# Altium PCB PCB3.PcbDoc
Units mm, origin at the board's own origin, x right, y up, seen from the top; angles counter-clockwise.
Board outline 159.89 x 71.5 mm, 2 copper layers (Top Layer, Bottom Layer); 21 components, 42 nets, 178 pads, 49 vias.
Unrouted connection lines stored in the file: 2.
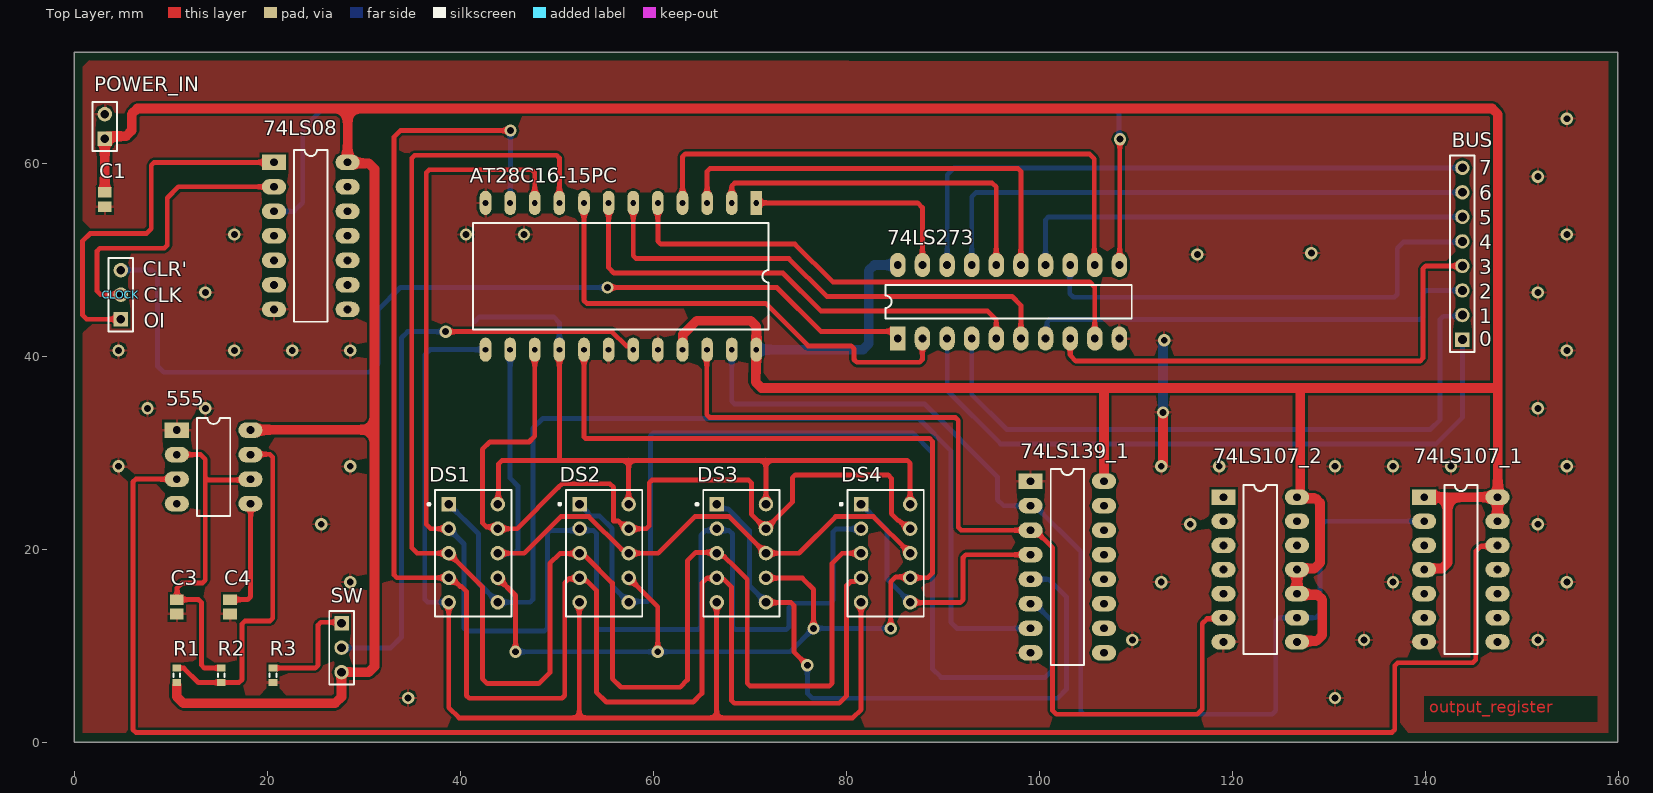
[diagram p0: Top Layer view]
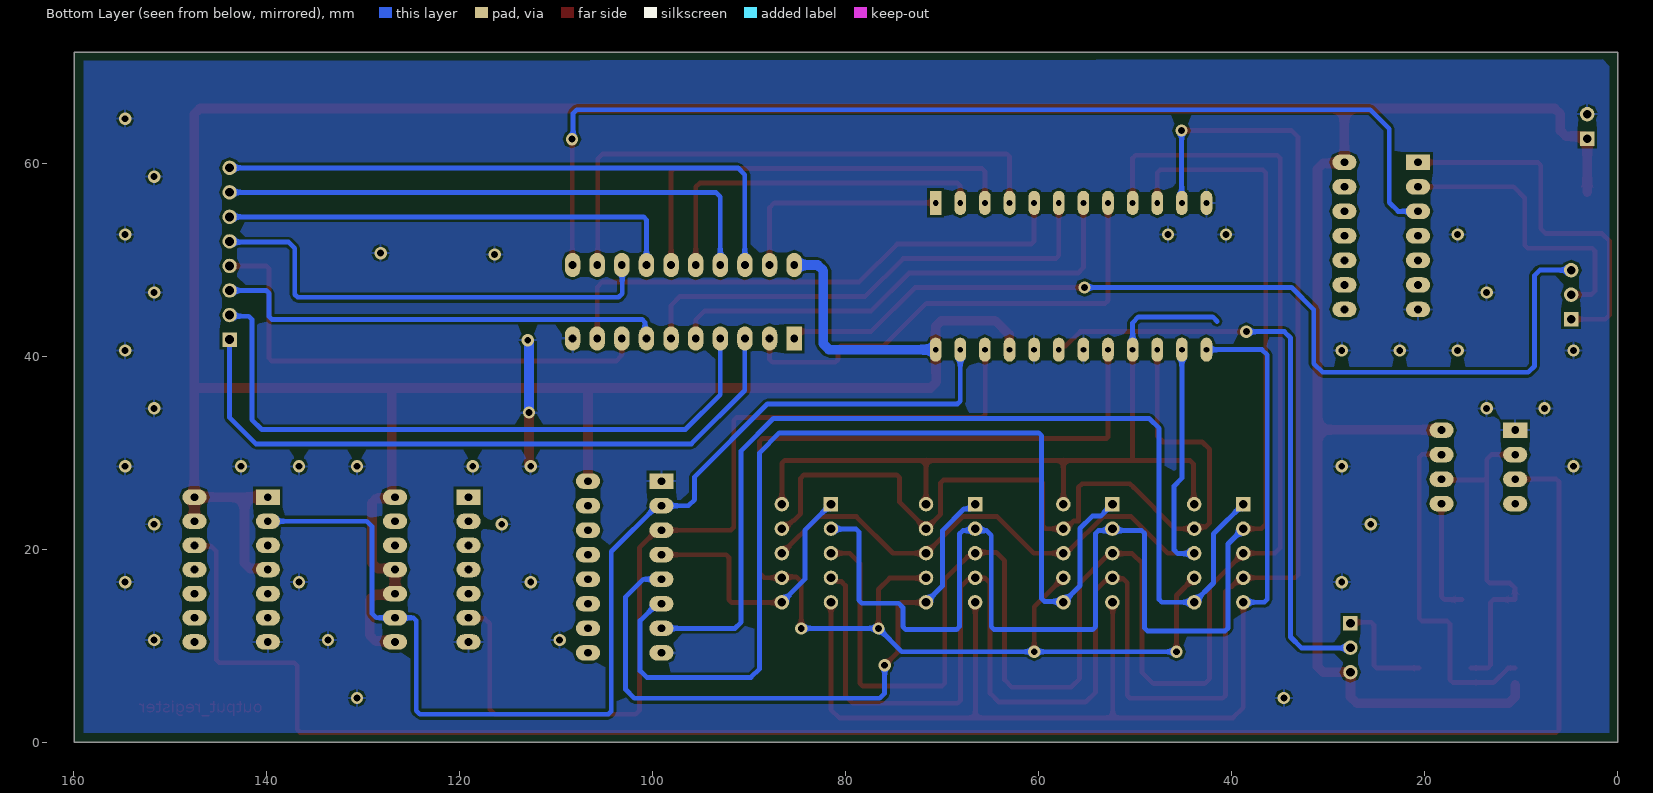
[diagram p1: Bottom Layer view, seen from below]

## Layer stack, top to bottom
Top Solder: solder mask 0.0102, Solder Resist, Dk 3.5
Top Layer: signal copper 0.0356
Dielectric 1: dielectric 0.32, FR-4, Dk 4.8
Bottom Layer: signal copper 0.0356
Bottom Solder: solder mask 0.0102, Solder Resist, Dk 3.5

## Board outline
0,0 159.893,0 159.893,71.501 0,71.501

## Design rules (kind name [scope] priority, off if disabled: settings)
Clearance [All] p1: gap=0.254 ignorepadtopadclearanceinfootprint=FALSE except(0: Arc-Hole Track-Hole SMDPad-Hole THPad-Hole Via-Hole Fill-Hole Poly-Hole Region-Hole Text-Hole; 0.245: Arc-SMDPad Track-SMDPad; 1: Arc-Arc Arc-Track Track-Track)
PolygonConnect [All] p1: connectstyle=Relief reliefconductorwidth=0.254 reliefentries=4 polygonreliefangle="90 Angle" airgapwidth=0.254
RoutingVias [All] p1: holewidth=0.711 width=1.27 viastyle="Through Hole" minholewidth=0.711 minwidth=1.27 maxholewidth=0.711 maxwidth=1.27
SolderMaskExpansion [All] p1: expansion=0.102 istentingtop=FALSE
Width VCC [InNet('VCC')] p1: maxlimit=2 minlimit=1 preferedwidth=1
Width GND [InNet('GND')] p2: maxlimit=2 minlimit=1 preferedwidth=1
Width [All] p3: maxlimit=1 minlimit=0.5 preferedwidth=0.5
30 further rules are at their usual default settings.

## Components (designator, comment, footprint, x,y, rotation, side; value= is the part's Value field where it differs from the comment)
74LS08 "DM74LS08N" SN74LS08N 20.708,60.084 r0 top
74LS107_1 "SN74LS107AN" DM74LS107 139.824,25.408 r0 top
74LS107_2 "SN74LS107AN" DM74LS107 119.048,25.408 r0 top
74LS139_1 "SN74LS139AN" SN74LS139AN 99.065,27.066 r0 top
74LS273 "SN74LS273N" SN74LS273N 85.313,41.833 r90 top
555 "NE555P" LM555 10.642,32.35 r0 top
AT28C16-15PC "AT28C16-15PC" AT28C16-15PC 70.662,55.88 r270 top
BUS "Header 8" HDR1X8 143.788,41.729 r90 top
C1 "Cap Pol3" C0805 3.182,56.215 r270 top value=0.1uF
C3 "Cap Pol3" C0805 10.642,14.048 r270 top value=0.01uF
C4 "Cap Pol3" C0805 16.15,14.048 r270 top value=0.01uF
CLOCK "Header 3" HDR1X3 4.845,43.838 r90 top
DS1 "Dpy Red-CA" A 41.344,19.595 r0 top
DS2 "Dpy Red-CA" A 54.894,19.595 r0 top
DS3 "Dpy Red-CA" A 69.116,19.595 r0 top
DS4 "Dpy Red-CA" A 84.045,19.595 r0 top
POWER_IN "Header 2" HDR1X2 3.182,62.533 r90 top
R1 "Res3" J1-0603 10.642,6.956 r270 top value=1K
R2 "Res3" J1-0603 15.24,6.956 r90 top value=100K
R3 "Res3" J1-0603 20.612,6.956 r270 top value=1K
SW "Header 3" HDR1X3 27.702,12.356 r270 top

## Footprints (in the part's own frame and the unit in brackets; to place one, negate y for a bottom-side part, rotate by r counter-clockwise, add the part's x,y. Pads: shape width x height; smd on the part's side, far side on the other; paste and mask are expansions set on the pad)
A [mm] "LED, 7-Segment Display, 7.62 mm, RHD; 10 Leads; Row Space 5.08 mm; Pitch 2.54 mm"
  rect 1.5x1.5 hole 0.9: 1(-2.54,5.08)
  round 1.5 hole 0.9: 2(-2.54,2.54) 3(-2.54,0) 4(-2.54,-2.54) 5(-2.54,-5.08) 6(2.54,-5.08) 7(2.54,-2.54) 8(2.54,0) 9(2.54,2.54) 10(2.54,5.08)
  silkscreen extent -4.72,-6.55 3.95,6.55, body extent -3.95,-6.55 3.95,6.55, height 6.34
AT28C16-15PC [mm]
  rect 2.5x1.2 hole 0.6: 1(0,0)
  oval 2.5x1.2 hole 0.6: 2(0,-2.55) 3(0,-5.1) 4(0,-7.65) 5(0,-10.2) 6(0,-12.75) 7(0,-15.3) 8(0,-17.85) 9(0,-20.4) 10(0,-22.95) 11(0,-25.5) 12(0,-28.05) 13(15.2,-28.05) 14(15.2,-25.5) 15(15.2,-22.95) 16(15.2,-20.4) 17(15.2,-17.85) 18(15.2,-15.3) 19(15.2,-12.75) 20(15.2,-10.2) 21(15.2,-7.65) 22(15.2,-5.1) 23(15.2,-2.55) 24(15.2,0)
  silkscreen extent 2.08,-29.32 13.12,1.27, body extent 0.13,-29.91 15.37,2.73, height 6.29
C0805 [mm] "Chip Capacitor, Body 2.0x1.3mm, IPC High Density"
  rect 1.1x1.4 smd: 1(-0.75,0) 2(0.75,0)
  body extent -1.1,-0.72 1.1,0.72, height 1.4
DM74LS107 [mm]
  rect 2.5x1.6 / inner rect 2.5x1.2 / far side rect 2.5x1.6 hole 0.8: 1(0,0)
  oval 2.5x1.6 / inner oval 2.5x1.2 / far side oval 2.5x1.6 hole 0.8: 2(0,-2.5) 3(0,-5) 4(0,-7.5) 5(0,-10) 6(0,-12.5) 7(0,-15) 8(7.6,-15) 9(7.6,-12.5) 10(7.6,-10) 11(7.6,-7.5) 12(7.6,-5) 13(7.6,-2.5) 14(7.6,0)
  silkscreen extent 2.08,-16.25 5.52,1.25, body extent -0.12,-17.49 7.75,2.51, height 5.6
HDR1X2 [mm] "Connector; Header; 2 Position"
  rect 1.5x1.5 hole 0.9: 1(0,0)
  round 1.5 hole 0.9: 2(2.54,0)
  silkscreen extent -1.27,-1.27 3.81,1.27
HDR1X3 [mm] "Connector; Header; 3 Position"
  rect 1.5x1.5 hole 0.9: 1(0,0)
  round 1.5 hole 0.9: 2(2.54,0) 3(5.08,0)
  silkscreen extent -1.27,-1.27 6.35,1.27
HDR1X8 [mm] "Connector; Header; 8 Position"
  rect 1.5x1.5 hole 0.9: 1(0,0)
  round 1.5 hole 0.9: 2(2.54,0) 3(5.08,0) 4(7.62,0) 5(10.16,0) 6(12.7,0) 7(15.24,0) 8(17.78,0)
  silkscreen extent -1.27,-1.27 19.05,1.27
J1-0603 [mm] "Chip Resistor, Body 1.6x0.8mm, IPC High Density"
  rect 0.7x0.9 smd: 1(-0.75,0) 2(0.75,0)
  silkscreen extent -0.2,-0.35 0.2,0.35, body extent -0.85,-0.48 0.85,0.48, height 0.9
LM555 [mm]
  rect 2.5x1.6 hole 0.8: 1(0,0)
  oval 2.5x1.6 hole 0.8: 2(0,-2.54) 3(0,-5.08) 4(0,-7.62) 5(7.62,-7.62) 6(7.62,-5.08) 7(7.62,-2.54) 8(7.62,0)
  silkscreen extent 2.08,-8.89 5.54,1.27, body extent -0.25,-9.65 14.6,1.78, height 4.69
SN74LS08N [mm]
  rect 2.5x1.6 hole 0.8: 1(0,0)
  oval 2.5x1.6 hole 0.8: 2(0,-2.54) 3(0,-5.08) 4(0,-7.62) 5(0,-10.16) 6(0,-12.7) 7(0,-15.24) 8(7.62,-15.24) 9(7.62,-12.7) 10(7.62,-10.16) 11(7.62,-7.62) 12(7.62,-5.08) 13(7.62,-2.54) 14(7.62,0)
  silkscreen extent 2.08,-16.51 5.54,1.27, body extent -0.19,-17.02 11.18,2.03, height 4.51
SN74LS139AN [mm]
  rect 2.5x1.6 / inner rect 2.5x1.2 / far side rect 2.5x1.6 hole 0.8: 1(0,0)
  oval 2.5x1.6 / inner oval 2.5x1.2 / far side oval 2.5x1.6 hole 0.8: 2(0,-2.54) 3(0,-5.08) 4(0,-7.62) 5(0,-10.16) 6(0,-12.7) 7(0,-15.24) 8(0,-17.78) 9(7.6,-17.78) 10(7.6,-15.24) 11(7.6,-12.7) 12(7.6,-10.16) 13(7.6,-7.62) 14(7.6,-5.08) 15(7.6,-2.54) 16(7.6,0)
  silkscreen extent 2.08,-19.05 5.52,1.27, body extent -0.25,-19.05 7.62,0.95, height 5.6
SN74LS273N [mm]
  rect 2.5x1.6 hole 0.8: 1(0,0)
  oval 2.5x1.6 hole 0.8: 2(0,-2.55) 3(0,-5.1) 4(0,-7.65) 5(0,-10.2) 6(0,-12.75) 7(0,-15.3) 8(0,-17.85) 9(0,-20.4) 10(0,-22.95) 11(7.62,-22.95) 12(7.62,-20.4) 13(7.62,-17.85) 14(7.62,-15.3) 15(7.62,-12.75) 16(7.62,-10.2) 17(7.62,-7.65) 18(7.62,-5.1) 19(7.62,-2.55) 20(7.62,0)
  silkscreen extent 2.08,-24.22 5.54,1.27, body extent 0,-23.73 7.87,0.87, height 4.86

## Part data
74LS08: "IC GATE AND 4CH 2-INP 14-DIP", Case/Package=DIP, High Level Output Current=-400uA, Low Level Output Current=8mA, Manufacturer="ON Semiconductor / Fairchild", Max Operating Temperature=70°C, Max Supply Voltage=5.25V, Min Operating Temperature=0°C, Min Supply Voltage=4.75V, Package Quantity=25, Supplier Part Number 1=512-DM74LS08N, Category="Logic Gates", ComponentLink1Description=https://datasheet.ciiva.com/4825/74ls08-196234-4825713.pdf?src-supplier=Mouser, ComponentLink1URL=https://datasheet.ciiva.com/4825/74ls08-196234-4825713.pdf?src-supplier=Mouser, ComponentLink2Description=https://datasheet.ciiva.com/1877/dm74ls08-1877307.pdf?src-supplier=Digi-Key, ComponentLink2URL=https://datasheet.ciiva.com/1877/dm74ls08-1877307.pdf?src-supplier=Digi-Key, Lead Free="Contains Lead", Logic Function=AND, Manufacturer Part Number=DM74LS08N, Mount="Through Hole", Number of Circuits=4, Number of Gates=4, Number of Inputs=2, Number of Pins=14, Packaging=Rail/Tube, Propagation Delay=18ns, RoHS=Yes, Supplier 1=Mouser
74LS107_1 74LS107_2: "Flip Flop JK-Type Neg-Edge 2-Element 14-Pin PDIP Tube", Case/Package=PDIP, Frequency=45MHz, High Level Output Current=-400uA, Low Level Output Current=8mA, Manufacturer="Texas Instruments", Max Operating Temperature=70°C, Max Supply Voltage=5.25V, Min Operating Temperature=0°C, Min Supply Voltage=4.75V, Nominal Supply Current=100uA, Operating Supply Voltage=5V, Package Quantity=25, Supplier Part Number 1=95M4428, Clock Edge Trigger Type="Negative Edge,Positive Edge", ComponentLink1Description=https://www.distrelec.biz/Web/Downloads/_t/ds/sn74ls107a_eng_tds.pdf?mime=application%2Fpdf&src-supplier=Distrelec, ComponentLink1URL=https://www.distrelec.biz/Web/Downloads/_t/ds/sn74ls107a_eng_tds.pdf?mime=application%2Fpdf&src-supplier=Distrelec, ComponentLink2Description=http://focus.ti.com/lit/ds/symlink/sn74107.pdf?src-supplier=Avnet+Europe, ComponentLink2URL=http://focus.ti.com/lit/ds/symlink/sn74107.pdf?src-supplier=Avnet+Europe, ComponentLink3Description=http://www.ti.com/general/docs/lit/getliterature.tsp?genericPartNumber=SN74LS107A&&fileType=pdf&src-supplier=Avnet, ComponentLink3URL=http://www.ti.com/general/docs/lit/getliterature.tsp?genericPartNumber=SN74LS107A&&fileType=pdf&src-supplier=Avnet, ComponentLink4Description=https://source.z2data.com/2016/10/12/6/26/54/563/639426/sn74107.pdf?src-supplier=Digi-Key, ComponentLink4URL=https://source.z2data.com/2016/10/12/6/26/54/563/639426/sn74107.pdf?src-supplier=Digi-Key, ComponentLink5Description=http://www.farnell.com/datasheets/1967736.pdf?src-supplier=Element14, ComponentLink5URL=http://www.farnell.com/datasheets/1967736.pdf?src-supplier=Element14, ComponentLink6Description=https://www.verical.com/server-webapp/html/getDatasheet?partID=250176&src-supplier=Verical, ComponentLink6URL=https://www.verical.com/server-webapp/html/getDatasheet?partID=250176&src-supplier=Verical, Height=4.57mm, Lead Free="Lead Free", Length=19.69mm, Logic Function=Flip-Flop,JK-Type, Manufacturer Part Number=SN74LS107AN, Max Frequency=45MHz, Mount="Through Hole", Number of Bits=2, Number of Bits per Element=1, Number of Circuits=2, Number of Elements=2, Number of Input Lines=4, Number of Output Lines=2, Number of Pins=14, Output Current=8mA, Output Type=TTL, Packaging=Rail/Tube, Polarity=Non-Inverting, Propagation Delay=20ns, Radiation Hardening=No, REACH SVHC="No SVHC", Stock 1=0, Supplier 1=Newark, Turn-On Delay Time=15ns, Weight=0.032734oz, Width=6.6mm
74LS139_1: "TEXAS INSTRUMENTS         SN74LS139AN            IC, DECODER/DEMUX, 74LS139", Case/Package=PDIP, High Level Output Current=-400uA, Low Level Output Current=8mA, Manufacturer="Texas Instruments", Max Operating Temperature=70°C, Max Power Dissipation=200mW, Max Supply Voltage=5.25V, Min Operating Temperature=0°C, Min Supply Voltage=4.75V, Nominal Supply Current=100uA, Operating Supply Voltage=5V, Package Quantity=25, Supplier Part Number 1=308253, Bandwidth=35MHz, ComponentLink1Description=http://www.farnell.com/datasheets/2018724.pdf?src-supplier=Element14, ComponentLink1URL=http://www.farnell.com/datasheets/2018724.pdf?src-supplier=Element14, ComponentLink2Description=https://www.distrelec.biz/Web/Downloads/57/06/lm645706.pdf?mime=application%2Fpdf&src-supplier=Distrelec, ComponentLink2URL=https://www.distrelec.biz/Web/Downloads/57/06/lm645706.pdf?mime=application%2Fpdf&src-supplier=Distrelec, ComponentLink3Description=http://www.ti.com/lit/ds/symlink/sn74s139a.pdf?src-supplier=Digi-Key, ComponentLink3URL=http://www.ti.com/lit/ds/symlink/sn74s139a.pdf?src-supplier=Digi-Key, ComponentLink4Description=https://www.verical.com/server-webapp/html/getDatasheet?partID=83287&src-supplier=Verical, ComponentLink4URL=https://www.verical.com/server-webapp/html/getDatasheet?partID=83287&src-supplier=Verical, Height=4.57mm, Independent Circuits=2, Lead Free="Lead Free", Length=19.3mm, Logic Function=Demultiplexer,Decoder, Manufacturer Part Number=SN74LS139AN, Mount="Through Hole", Number of Bits=4, Number of Channels=2, Number of Circuits=2, Number of Elements=2, Number of Input Lines=2, Number of Inputs=2, Number of Output Lines=4, Number of Outputs=4, Number of Pins=16, Packaging=Rail/Tube, Polarity=Inverting, Propagation Delay=33ns, Radiation Hardening=No, REACH SVHC="No SVHC", Stock 1=0, Supplier 1=RSComponents, Supply Type=Single, Throw Configuration=DP4T, Turn-On Delay Time=38ns, Weight=0.03357oz, Width=6.35mm
74LS273: "IC D-TYPE POS TRG SNGL 20DIP", Case/Package=PDIP, Frequency=40MHz, High Level Output Current=-400uA, Low Level Output Current=8mA, Manufacturer="Texas Instruments", Max Operating Temperature=70°C, Max Supply Voltage=5.25V, Min Operating Temperature=0°C, Min Supply Voltage=4.75V, Operating Supply Voltage=5V, Package Quantity=20, Supplier Part Number 1=0308354, Clock Edge Trigger Type="Positive Edge", ComponentLink1Description=https://www.distrelec.biz/Web/Downloads/14/_e/kg645614_E.pdf?mime=application%2Fpdf&src-supplier=Distrelec, ComponentLink1URL=https://www.distrelec.biz/Web/Downloads/14/_e/kg645614_E.pdf?mime=application%2Fpdf&src-supplier=Distrelec, ComponentLink2Description=http://focus.ti.com/lit/ds/symlink/sn74273.pdf?src-supplier=Avnet+Europe, ComponentLink2URL=http://focus.ti.com/lit/ds/symlink/sn74273.pdf?src-supplier=Avnet+Europe, ComponentLink3Description=http://www.ti.com/lit/ds/symlink/sn74ls273.pdf?src-supplier=Digi-Key, ComponentLink3URL=http://www.ti.com/lit/ds/symlink/sn74ls273.pdf?src-supplier=Digi-Key, ComponentLink4Description=https://www.verical.com/server-webapp/html/getDatasheet?partID=250181&src-supplier=Verical, ComponentLink4URL=https://www.verical.com/server-webapp/html/getDatasheet?partID=250181&src-supplier=Verical, ComponentLink5Description=http://datasheet.iiic.cc/texas_instruments/SN74LS273N.pdf?src-supplier=IIIC, ComponentLink5URL=http://datasheet.iiic.cc/texas_instruments/SN74LS273N.pdf?src-supplier=IIIC, ComponentLink6Description=http://www.produktinfo.conrad.com/datenblaetter/175000-199999/175129-da-01-en-LOGIK_IC_SN_74_LS_273_N_DIP20__TID.pdf?src-supplier=Conrad, ComponentLink6URL=http://www.produktinfo.conrad.com/datenblaetter/175000-199999/175129-da-01-en-LOGIK_IC_SN_74_LS_273_N_DIP20__TID.pdf?src-supplier=Conrad, ComponentLink7Description=http://www.produktinfo.conrad.com/datenblaetter/1000000-1099999/001016947-da-01-en-IC_DTPE_POS_TRG_S_SN74LS273N_PDIP_20_TID.pdf?src-supplier=Conrad, ComponentLink7URL=http://www.produktinfo.conrad.com/datenblaetter/1000000-1099999/001016947-da-01-en-IC_DTPE_POS_TRG_S_SN74LS273N_PDIP_20_TID.pdf?src-supplier=Conrad, Height=4.57mm, Lead Free="Contains Lead", Length=24.33mm, Logic Function=D-Type,Flip-Flop, Manufacturer Part Number=SN74LS273N, Max Frequency=40MHz, Mount="Through Hole", Number of Bits=8, Number of Bits per Element=8, Number of Channels=8, Number of Circuits=8, Number of Elements=1, Number of Input Lines=2, Number of Output Lines=1, Number of Pins=20, Output Current=8mA, Output Type=TTL, Packaging=Rail/Tube, Polarity=Non-Inverting, Propagation Delay=27ns, Radiation Hardening=No, REACH SVHC="No SVHC", Stock 1=0, Supplier 1=RSComponents, Turn-On Delay Time=17ns, Weight=0.042297oz, Width=6.35mm
555: "TEXAS INSTRUMENTS         NE555P            TIMER SINGLE PRECISION,DIP8 ,0.5MHZ", Case/Package=PDIP, Current Rating=10mA, Frequency=500kHz, High Level Output Current=-200mA, Low Level Output Current=200mA, Manufacturer="Texas Instruments", Max Operating Temperature=70°C, Max Supply Voltage=16V, Min Operating Temperature=0°C, Min Supply Voltage=4.5V, Nominal Supply Current=2mA, Operating Supply Voltage=5V, Package Quantity=50, Quiescent Current=15mA, Supplier Part Number 1=296-NE555P-ND, Category="Clock and Timing", ComponentLink1Description=https://datasheet.ciiva.com/19457/904085-19457361.pdf?src-supplier=Jameco, ComponentLink1URL=https://datasheet.ciiva.com/19457/904085-19457361.pdf?src-supplier=Jameco, ComponentLink2Description=https://datasheet.ciiva.com/1139/sa555-1139904.pdf?src-supplier=Element14, ComponentLink2URL=https://datasheet.ciiva.com/1139/sa555-1139904.pdf?src-supplier=Element14, ComponentLink3Description=https://datasheet.ciiva.com/26325/152184-da-01-en-ne555p-timer-tid-26325915.pdf?src-supplier=Conrad, ComponentLink3URL=https://datasheet.ciiva.com/26325/152184-da-01-en-ne555p-timer-tid-26325915.pdf?src-supplier=Conrad, ComponentLink4Description=https://datasheet.ciiva.com/1147/1764032-1147750.pdf?src-supplier=Newark, ComponentLink4URL=https://datasheet.ciiva.com/1147/1764032-1147750.pdf?src-supplier=Newark, ComponentLink5Description=https://datasheet.ciiva.com/14094/ne555-series-eng-tds-14094950.pdf?src-supplier=Distrelec, ComponentLink5URL=https://datasheet.ciiva.com/14094/ne555-series-eng-tds-14094950.pdf?src-supplier=Distrelec, ComponentLink6Description=https://datasheet.ciiva.com/14274/ne555-14274456.pdf?src-supplier=Avnet, ComponentLink6URL=https://datasheet.ciiva.com/14274/ne555-14274456.pdf?src-supplier=Avnet, ComponentLink7Description=https://datasheet.ciiva.com/15152/getdatasheetpartid-248510-15152620.pdf?src-supplier=Verical, ComponentLink7URL=https://datasheet.ciiva.com/15152/getdatasheetpartid-248510-15152620.pdf?src-supplier=Verical, ComponentLink8Description=https://datasheet.ciiva.com/1233/ne555-1233454.pdf?src-supplier=Digi-Key, ComponentLink8URL=https://datasheet.ciiva.com/1233/ne555-1233454.pdf?src-supplier=Digi-Key, ComponentLink9Description=https://datasheet.ciiva.com/26228/ne555-26228892.pdf?src-supplier=Avnet+Europe, ComponentLink9URL=https://datasheet.ciiva.com/26228/ne555-26228892.pdf?src-supplier=Avnet+Europe, Contact Plating=Gold, Height=4.57mm, Lead Free="Lead Free", Length=9.81mm, Manufacturer Part Number=NE555P, Mount="Through Hole", Number of Pins=8, Number of Timers/Counters=1, Operating Supply Current=10mA, Packaging=Rail/Tube, Pricing 1="1=0,45000, 10=0,34200, 25=0,30800, 100=0,21280, 250=0,17920, 500=0,14560, 1000=0,11200, 2500=0,10080, 5000=0,09520 (USD)", Radiation Hardening=No, REACH SVHC="No SVHC", RoHS=Yes, Stock 1=8033, Supplier 1=Digi-Key, Weight=0.015535oz, Width=6.35mm
AT28C16-15PC: Case/Package=DIP, Frequency=150GHz, Manufacturer="Microchip / Atmel", Max Operating Temperature=70°C, Max Supply Voltage=5.5V, Min Operating Temperature=0°C, Min Supply Voltage=4.5V, Nominal Supply Current=30mA, Operating Supply Voltage=5V, Package Quantity=16, Supplier Part Number 1=AT28C16-15PC-ND, Access Time=150ns, ComponentLink1Description=http://www.atmel.com/Images/doc0540.pdf?src-supplier=Digi-Key, ComponentLink1URL=http://www.atmel.com/Images/doc0540.pdf?src-supplier=Digi-Key, ComponentLink2Description=http://components.arrow.com/part/dataview/66884S2427492N3744?src-supplier=Arrow, ComponentLink2URL=http://components.arrow.com/part/dataview/66884S2427492N3744?src-supplier=Arrow, Density=16Kb, Interface=Parallel, Lead Free="Contains Lead", Manufacturer Part Number=AT28C16-15PC, Memory Size=16Kb, Memory Type=EEPROM, Mount="Through Hole", Number of Pins=24, Packaging=Rail/Tube, Stock 1=0, Supplier 1=Digi-Key
BUS: "Header, 8-Pin", LatestRevisionDate=17-Jul-2002, LatestRevisionNote="Re-released for DXP Platform.", Publisher="Altium Limited"
C1 C3 C4: "Polarized Capacitor (Surface Mount)", LatestRevisionDate=29-May-2009, LatestRevisionNote="IPC-7351 Footprint Added.", PackageDescription="Chip Capacitor", PackageReference=C0805, Published=8-Jun-2000, Publisher="Altium Limited"
CLOCK SW: "Header, 3-Pin", LatestRevisionDate=17-Jul-2002, LatestRevisionNote="Re-released for DXP Platform.", Publisher="Altium Limited"
DS1 DS2 DS3 DS4: "7.62 mm Black Surface HER 7-Segment Display: CA, RH DP", Colour="High Efficiency Red (HER)", ComponentLink1Description="Manufacturer Link", ComponentLink1URL=http://www.agilent.com/, DatasheetVersion=19-Feb-2002, LatestRevisionDate=17-Dec-2003, LatestRevisionNote="Schematic revised, PCB Footprint replaced.", MinimumIntensity="360 ucd", Note="IF = 5 mA", PackageDescription="LED, 7-Segment Display, 7.62 mm, RHD; 10 Leads; Row Space 5.08 mm; Pitch 2.54 mm", PackageReference=A, PackageVersion=11-Feb-2002, Published=8-Jun-2000, Publisher="Altium Limited"
POWER_IN: "Header, 2-Pin", LatestRevisionDate=17-Jul-2002, LatestRevisionNote="Re-released for DXP Platform.", Publisher="Altium Limited"
R1 R2 R3: "Resistor", LatestRevisionDate=29-May-2009, LatestRevisionNote="IPC-7351 Footprint Added.", PackageDescription="Chip Resistor", PackageReference=J1-0603, Published=8-Jun-2000, Publisher="Altium Limited"

## Via types
v1: diameter 1.27, hole 0.711, Top Layer to Bottom Layer, 49 vias

## Nets (pads, with @x,y where several pads share a name; then routed paths per layer and width w, separated by ;. In a path a pad name is that pad's centre, name@x,y a point inside that pad or via, vN(x,y) a via of type N, cw(c..) or ccw(c..) an arc to the next point about the centre after c; other vN are vias at no path point)
GND: 74LS08.7 74LS107_1.7 74LS107_2.7 74LS139_1.1 74LS139_1.8 74LS273.10 555.1 AT28C16-15PC.12 AT28C16-15PC.18 AT28C16-15PC.20 C1.2 C3.2 C4.2 POWER_IN.2 R3.2 | length 13.2
  Top Layer w1: v1(112.6,28.6) 112.776,28.776 v1(112.776,34.163)
  Bottom Layer w1: v1(112.776,34.163) 112.776,41.529 v1(112.903,41.656)
  other v1: 34.6,4.6 130.6,4.6 109.6,10.6 133.6,10.6 151.6,10.6 28.6,16.6 112.6,16.6 136.6,16.6 154.6,16.6 25.6,22.6 115.6,22.6 151.6,22.6 4.6,28.6 28.6,28.6 118.6,28.6 130.6,28.6 136.6,28.6 142.6,28.6 154.6,28.6 7.6,34.6 13.6,34.6 151.6,34.6 4.6,40.6 16.6,40.6 22.6,40.6 28.6,40.6 154.6,40.6 13.6,46.6 151.6,46.6 116.332,50.546 128.143,50.673 16.6,52.6 40.6,52.6 46.6,52.6 154.6,52.6 151.6,58.6 154.6,64.6
Net74LS08_1: 74LS08.1 CLOCK.1 | length 38.9
  Top Layer w0.5: CLOCK.1 1.293,43.838 0.889,44.242 0.889,51.943 1.651,52.705 7.493,52.705 8.001,53.213 8.001,59.778 8.294,60.071 20.695,60.071 74LS08.1 74LS08.1@20.679,60.113
Net74LS08_2: 74LS08.2 CLOCK.2 | length 30.9
  Top Layer w0.5: CLOCK.2 2.747,46.378 2.389,46.736 2.389,50.888 2.682,51.181 9.359,51.181 9.652,51.474 9.652,56.388 10.808,57.544 74LS08.2 74LS08.2@20.556,57.392
Net74LS08_3: 74LS08.3 74LS273.11 | length 112.4
  Top Layer w0.5: 74LS273.11 108.297,49.487 108.297,62.45 v1(108.331,62.484)
  Bottom Layer w0.5: 74LS08.3 22.77,55.004 23.688,55.922 23.688,63.566 25.654,65.532 107.823,65.532 108.204,65.151 108.204,62.611 v1(108.331,62.484) ; 74LS273.11@108.204,49.512 74LS273.11
Net74LS107_1_2: 74LS107_1.2 74LS107_2.9 74LS139_1.2 AT28C16-15PC.23 | length 120.6
  Bottom Layer w0.5: AT28C16-15PC.23 68.112,35.345 68.405,35.052 88.086,35.052 95.631,27.507 95.631,25.146 96.266,24.511 99.05,24.511 74LS139_1.2 99.515,24.526 104.267,19.774 104.267,3.214 104.56,2.921 124.079,2.921 124.46,3.302 124.46,12.616 124.753,12.908 74LS107_2.9 128.605,12.908 129.032,13.335 129.032,22.352 129.588,22.908 74LS107_1.2
Net74LS107_1_12: 74LS107_1.12 555.3 | length 190.3
  Top Layer w0.5: 555.3 6.389,27.27 6.096,26.977 6.096,1.333 6.389,1.04 136.486,1.04 136.779,1.333 136.779,7.962 137.072,8.255 144.868,8.255 145.161,8.548 145.161,19.812 145.669,20.32 147.336,20.32 74LS107_1.12
Net74LS107_2_6: 74LS107_2.6 74LS139_1.3 AT28C16-15PC.22 | length 98.8
  Top Layer w0.5: AT28C16-15PC.22 65.532,40.65 65.532,33.948 65.825,33.655 91.274,33.655 91.567,33.362 91.567,22.279 91.86,21.986 74LS139_1.3 99.515,21.986 101.346,20.155 101.346,3.302 101.727,2.921 116.332,2.921 116.84,3.429 116.84,12.319 117.348,12.827 118.967,12.827 74LS107_2.6
Net74LS139_1_4: 74LS139_1.4 DS4.1 DS4.6 | length 29.4
  Top Layer w0.5: DS4.6 86.623,14.478 91.782,14.478 92.075,14.771 92.075,19.153 92.368,19.446 74LS139_1.4
  Bottom Layer w0.5: DS4.1 84.2,21.981 84.2,16.901 DS4.6
Net74LS139_1_5: 74LS139_1.5 DS3.1 DS3.6 | length 66.8
  Top Layer w0.5: DS3.6 71.693,14.478 74.256,14.478 74.549,14.185 74.549,9.398 v1(75.946,8.001)
  Bottom Layer w0.5: DS3.1 67.076,24.175 67.735,24.175 69.965,21.945 69.965,16.206 DS3.6 ; v1(75.946,8.001) 75.946,5.08 76.454,4.572 101.854,4.572 102.767,5.485 102.767,15.089 100.95,16.906 74LS139_1.5
Net74LS139_1_6: 74LS139_1.6 DS2.1 DS2.6 | length 105.7
  Bottom Layer w0.5: DS2.1 53.585,23.444 54.43,23.444 55.709,22.165 55.709,16.24 DS2.6 57.523,14.605 59.397,14.605 59.69,14.898 59.69,31.759 59.983,32.052 86.844,32.052 88.9,29.996 88.9,7.62 89.789,6.731 100.584,6.731 101.267,7.414 101.267,12.614 99.515,14.366 74LS139_1.6
Net74LS139_1_7: 74LS139_1.7 DS1.1 DS1.6 | length 105.1
  Bottom Layer w0.5: DS1.1 41.886,21.594 41.886,16.514 DS1.6 47.229,14.515 47.522,14.808 47.522,32.521 48.553,33.552 87.465,33.552 90.805,30.212 90.805,12.446 91.44,11.811 99.05,11.811 74LS139_1.7
Net74LS273_1: 74LS273.1 CLOCK.3 | length 99.6
  Top Layer w0.5: v1(55.245,47.117) 72.795,47.117 77.343,42.569 84.763,42.569 85.313,42.019 74LS273.1
  Bottom Layer w0.5: CLOCK.3 8.105,48.918 8.636,48.387 8.636,38.989 9.29,38.335 30.588,38.335 31.496,39.243 31.496,44.831 33.782,47.117 v1(55.245,47.117)
Net74LS273_2: 74LS273.2 AT28C16-15PC.8 | length 50.8
  Top Layer w0.5: AT28C16-15PC.8 52.812,45.759 53.105,45.466 71.628,45.466 76.025,41.069 80.479,41.069 80.772,40.776 80.772,39.663 81.065,39.37 87.57,39.37 87.863,39.663 74LS273.2
Net74LS273_3: 74LS273.3 BUS.1 | length 70.3
  Bottom Layer w0.5: 74LS273.3 90.424,41.822 90.424,36.449 95.96,30.913 141.072,30.913 143.788,33.629 BUS.1
Net74LS273_4: 74LS273.4 BUS.2 | length 69.1
  Bottom Layer w0.5: 74LS273.4 92.964,41.832 92.964,36.03 96.581,32.413 140.451,32.413 141.478,33.44 141.478,43.815 141.807,44.144 143.663,44.144 BUS.2
Net74LS273_5: 74LS273.5 AT28C16-15PC.7 | length 51
  Top Layer w0.5: AT28C16-15PC.7 55.362,49.159 55.904,48.617 73.416,48.617 77.334,44.699 94.59,44.699 95.513,43.776 74LS273.5
Net74LS273_6: 74LS273.6 AT28C16-15PC.6 | length 51.2
  Top Layer w0.5: AT28C16-15PC.6 57.912,50.41 58.205,50.117 74.038,50.117 77.956,46.199 97.14,46.199 98.063,45.276 74LS273.6
Net74LS273_7: 74LS273.7 BUS.3 | length 47.5
  Bottom Layer w0.5: 74LS273.7 100.768,41.988 100.768,43.522 101.061,43.815 139.407,43.815 139.7,44.108 139.7,46.516 139.993,46.809 BUS.3
Net74LS273_8: 74LS273.8 BUS.4 | length 52.1
  Top Layer w0.5: 74LS273.8 103.163,40.093 103.759,39.497 139.407,39.497 139.7,39.79 139.7,49.056 139.993,49.349 BUS.4
Net74LS273_9: 74LS273.9 AT28C16-15PC.5 | length 56.5
  Top Layer w0.5: AT28C16-15PC.5 60.462,51.91 60.755,51.617 74.659,51.617 78.577,47.699 105.172,47.699 105.713,47.159 74LS273.9
Net74LS273_12: 74LS273.12 AT28C16-15PC.4 | length 58.8
  Top Layer w0.5: AT28C16-15PC.4 63.012,60.667 63.305,60.96 105.156,60.96 105.664,60.452 105.664,49.502 74LS273.12
Net74LS273_13: 74LS273.13 BUS.5 | length 49
  Bottom Layer w0.5: 74LS273.13 103.124,49.414 103.124,46.482 103.505,46.101 136.74,46.101 137.033,46.394 137.033,51.181 137.668,51.816 143.716,51.816 BUS.5
Net74LS273_14: 74LS273.14 BUS.6 | length 48
  Bottom Layer w0.5: 74LS273.14 100.613,54.136 100.905,54.429 BUS.6
Net74LS273_15: 74LS273.15 AT28C16-15PC.3 | length 45.7
  Top Layer w0.5: AT28C16-15PC.3 65.562,59.143 65.855,59.436 97.77,59.436 98.063,59.143 74LS273.15
Net74LS273_16: 74LS273.16 AT28C16-15PC.2 | length 37.5
  Top Layer w0.5: AT28C16-15PC.2 68.112,57.643 68.405,57.936 95.099,57.936 95.504,57.531 95.504,49.462 74LS273.16
Net74LS273_17: 74LS273.17 BUS.7 | length 58.1
  Bottom Layer w0.5: 74LS273.17 92.964,49.454 92.964,56.515 93.418,56.969 BUS.7
Net74LS273_18: 74LS273.18 BUS.8 | length 63
  Bottom Layer w0.5: 74LS273.18 90.424,49.464 90.424,58.801 91.132,59.509 BUS.8
Net74LS273_19: 74LS273.19 AT28C16-15PC.1 | length 23.3
  Top Layer w0.5: AT28C16-15PC.1 87.376,55.88 87.863,55.393 74LS273.19
Net555_2: 555.2 555.6 C3.1 R2.2 | length 36.3
  Top Layer w0.5: 555.2 13.116,29.81 13.589,29.337 13.589,27.471 ; R2.2 13.501,7.706 13.208,7.999 13.208,14.478 12.888,14.798 C3.1 10.668,14.825 10.668,16.002 11.176,16.51 13.296,16.51 13.589,16.803 13.589,27.471 ; 555.6 18.17,27.178 13.882,27.178 13.589,27.471
Net555_5: 555.5 C4.1 | length 11.9
  Top Layer w0.5: C4.1 17.973,14.798 18.288,15.113 18.288,24.703 555.5
Net555_7: 555.7 R1.1 R2.1 | length 35.8
  Top Layer w0.5: R1.1 11.38,7.706 12.88,6.206 R2.1 15.861,6.206 15.877,6.223 17.106,6.223 17.399,6.516 17.399,12.28 17.692,12.573 20.281,12.573 20.574,12.866 20.574,29.552 20.281,29.845 18.297,29.845 555.7
NetAT28C16-15PC_9: AT28C16-15PC.9 DS1.3 DS2.3 DS3.3 DS4.3 | length 180.2
  Top Layer w0.5: AT28C16-15PC.9 50.262,60.516 49.969,60.809 35.266,60.809 34.973,60.516 34.973,20.145 35.523,19.595 DS1.3 42.291,16.109 42.291,6.604 42.799,6.096 48.133,6.096 49.276,7.239 49.276,18.542 50.292,19.558 52.316,19.558 DS2.3 52.624,19.595 53.028,19.192 53.071,19.192 55.753,16.51 55.753,6.604 56.642,5.715 62.762,5.715 63.524,6.477 63.524,18.82 64.389,19.685 DS3.3@66.576,19.685 ; DS3.3 66.847,19.595 67.19,19.252 67.354,19.252 68.463,18.144 69.723,16.884 69.723,6.135 70.016,5.842 78.193,5.842 78.505,6.154 78.505,18.561 79.539,19.595 DS4.3
NetAT28C16-15PC_10: AT28C16-15PC.10 DS1.2 DS2.2 DS3.2 DS4.2 | length 155.4
  Top Layer w0.5: DS1.2 36.92,22.135 36.473,22.582 36.473,59.016 36.766,59.309 47.419,59.309 47.712,59.016 AT28C16-15PC.10
  Bottom Layer w0.5: DS1.2 40.386,20.554 40.386,11.85 40.679,11.557 48.729,11.557 49.022,11.85 49.022,21.651 49.315,21.944 52.162,21.944 DS2.2 52.545,21.944 53.809,21.944 54.102,21.651 54.102,11.977 54.395,11.684 64.604,11.684 64.897,11.977 64.897,21.463 65.378,21.944 66.385,21.944 DS3.2 66.767,21.944 67.845,21.944 68.199,21.59 68.199,11.977 68.492,11.684 73.748,11.684 74.041,11.977 74.041,13.97 74.488,14.417 78.298,14.417 78.613,14.732 78.613,21.805 78.906,22.098 81.468,22.098 DS4.2
NetAT28C16-15PC_11: AT28C16-15PC.11 DS1.4 DS2.4 DS3.4 DS4.4 | length 185.1
  Top Layer w0.5: v1(45.212,63.373) 33.782,63.373 33.147,62.738 33.147,17.348 33.44,17.055 39.075,17.055 39.973,16.157 40.121,16.157 40.64,15.638 40.64,4.865 40.933,4.572 50.531,4.572 50.824,4.865 50.824,16.547 51.22,16.943 52.242,16.943 DS2.4 52.624,17.055 52.965,16.715 53.135,16.715 54.102,15.748 54.102,5.207 55.118,4.191 64.135,4.191 65.024,5.08 65.024,16.51 65.512,16.998 66.519,16.998 DS3.4 66.767,16.864 67.337,16.864 68.076,16.125 68.076,4.357 68.369,4.064 79.248,4.064 80.005,4.821 80.005,16.251 80.421,16.667 80.846,16.667 81.235,17.055 DS4.4
  Bottom Layer w0.5: AT28C16-15PC.11 45.187,55.905 45.187,63.348 v1(45.212,63.373)
NetAT28C16-15PC_13: AT28C16-15PC.13 DS1.5 DS2.5 DS3.5 DS4.5 | length 123.9
  Top Layer w0.5: DS1.5 38.804,3.614 39.878,2.54 52.324,2.54 ; DS2.5 52.324,14.486 52.324,2.54 ; DS3.5 66.548,14.487 66.548,2.54 ; DS4.5 81.505,3.4 80.645,2.54 66.548,2.54 ; 52.324,2.54 66.548,2.54
  Bottom Layer w0.5: DS1.5 36.615,14.515 36.322,14.808 36.322,40.132 36.87,40.68 AT28C16-15PC.13
NetAT28C16-15PC_14: AT28C16-15PC.14 DS1.8 DS2.8 DS3.8 DS4.8 | length 75.5
  Top Layer w0.5: DS1.8 46.617,19.595 50.411,23.389 53.319,23.389 56.713,19.995 56.763,19.995 57.163,19.595 60.503,19.595 64.297,23.389 67.862,23.389 DS3.8 75.079,19.595 78.873,23.389 82.791,23.389 DS4.8
  Bottom Layer w0.5: DS1.8 43.922,19.558 45.593,19.558 45.974,19.939 45.974,26.543 45.162,27.355 AT28C16-15PC.14
NetAT28C16-15PC_15: AT28C16-15PC.15 DS1.9 DS2.9 DS3.9 DS4.9 | length 90
  Top Layer w0.5: AT28C16-15PC.15 47.712,31.71 47.117,31.115 43.053,31.115 42.291,30.353 42.291,22.733 42.697,22.327 43.693,22.327 DS1.9 45.884,22.135 50.165,26.416 50.546,26.797 55.499,26.797 55.88,26.416 55.88,22.949 56.349,22.949 57.163,22.135 59.27,22.135 59.563,22.428 59.563,26.885 59.856,27.178 69.863,27.178 70.156,26.885 70.156,23.635 71.693,22.098 71.693,22.173 74.398,24.877 74.398,27.417 74.691,27.71 84.304,27.71 84.645,27.368 84.645,23.686 85.364,22.967 85.483,22.967 86.315,22.135 DS4.9
NetAT28C16-15PC_16: AT28C16-15PC.16 DS1.10 DS2.10 DS3.10 DS4.10 | length 83.8
  Top Layer w0.5: DS1.10 43.942,24.733 43.942,28.829 44.323,29.21 50.165,29.21 50.262,29.307 ; AT28C16-15PC.16 50.262,29.307 ; DS2.10 57.434,29.21 ; DS3.10 71.656,29.21 ; DS4.10 86.585,28.917 86.292,29.21 71.656,29.21 ; 50.262,29.307 50.359,29.21 57.434,29.21 ; 57.434,29.21 71.656,29.21
  Bottom Layer w0.5: 41.508,43.599 41.978,44.069 49.657,44.069 50.262,43.464 AT28C16-15PC.16
NetAT28C16-15PC_17: AT28C16-15PC.17 DS1.7 DS2.7 DS3.7 DS4.7 | length 135.2
  Top Layer w0.5: DS1.7 45.72,15.22 v1(45.72,9.398) ; AT28C16-15PC.17 52.812,31.643 52.959,31.496 88.607,31.496 88.9,31.203 88.9,17.526 88.429,17.055 DS4.7 86.496,17.145 85.09,17.145 84.582,16.637 v1(84.582,11.811) ; DS2.7 60.452,14.037 v1(60.452,9.398) ; DS3.7 71.693,17.018 75.438,17.018 76.581,15.875 v1(76.581,11.811)
  Bottom Layer w0.5: v1(45.72,9.398) v1(60.452,9.398) 74.168,9.398 v1(76.581,11.811) v1(84.582,11.811)
NetAT28C16-15PC_19: AT28C16-15PC.19 SW.2 | length 62.8
  Top Layer w0.5: v1(38.481,42.545) 55.708,42.545 57.184,41.069 57.589,41.069 57.912,40.746 AT28C16-15PC.19
  Bottom Layer w0.5: SW.2 27.74,9.779 32.766,9.779 33.909,10.922 33.909,41.91 34.544,42.545 v1(38.481,42.545)
NetR3_1: R3.1 SW.1 | length 11.5
  Top Layer w0.5: R3.1 24.98,7.706 25.273,7.999 25.273,12.153 25.566,12.446 27.613,12.446 SW.1
VCC: 74LS08.14 74LS107_1.1 74LS107_1.4 74LS107_1.13 74LS107_1.14 74LS107_2.8 74LS107_2.10 74LS107_2.11 74LS107_2.14 74LS139_1.16 74LS273.20 555.8 AT28C16-15PC.21 AT28C16-15PC.24 C1.1 POWER_IN.1 R1.2 SW.3 | length 470.2
  Top Layer w1: C1.1 POWER_IN.1 3.432,62.783 5.383,62.783 5.969,63.369 5.969,65.073 6.555,65.659 28.328,65.659 ; R1.2@10.642,5.956 10.642,4.725 11.303,4.064 27.051,4.064 27.702,4.715 SW.3 ; 555.8 18.295,32.383 31.115,32.383 ; SW.3@27.708,7.282 30.529,7.282 31.115,7.868 31.115,32.383 ; AT28C16-15PC.21 63.05,40.718 63.05,42.25 64.488,43.688 70.076,43.688 70.662,43.102 AT28C16-15PC.24 70.624,40.642 70.624,38.301 70.612,38.289 70.612,37.289 71.198,36.703 106.807,36.703 ; 74LS139_1.16 106.665,36.561 106.807,36.703 ; 74LS107_2.8 126.763,10.523 128.7,10.523 129.286,11.109 129.286,14.781 128.774,15.294 126.763,15.294 74LS107_2.10 74LS107_2.11 126.763,18.023 128.446,18.023 129.032,18.609 129.032,24.814 128.553,25.294 126.763,25.294 74LS107_2.14 126.706,25.408 126.983,25.686 126.983,36.703 ; 74LS107_1.4 139.939,18.023 141.654,18.023 142.24,18.609 142.24,25.408 ; 74LS107_1.1 142.24,25.408 ; 74LS107_1.13 74LS107_1.14 ; 28.328,65.659 146.861,65.659 147.447,65.073 147.447,36.703 147.447,36.322 ; 28.328,65.659 74LS08.14 28.443,59.969 30.529,59.969 31.115,59.383 31.115,32.383 ; 106.807,36.703 126.983,36.703 ; 126.983,36.703 147.066,36.703 147.447,36.322 ; 142.24,25.408 74LS107_1.14 ; 74LS107_1.14 147.424,25.663 147.447,25.686 147.447,36.322
  Bottom Layer w1: AT28C16-15PC.24 81.701,40.68 82.296,41.275 82.296,48.867 82.882,49.453 74LS273.20
pads on no net: 74LS08.4 74LS08.5 74LS08.6 74LS08.8 74LS08.9 74LS08.10 74LS08.11 74LS08.12 74LS08.13 74LS107_1.3 74LS107_1.5 74LS107_1.6 74LS107_1.8 74LS107_1.9 74LS107_1.10 74LS107_1.11 74LS107_2.1 74LS107_2.2 74LS107_2.3 74LS107_2.4 74LS107_2.5 74LS107_2.12 74LS107_2.13 74LS139_1.9 74LS139_1.10 74LS139_1.11 74LS139_1.12 74LS139_1.13 74LS139_1.14 74LS139_1.15 555.4

## Polygon pours and split planes (outlines as drawn)
GND on Top Layer "GND_L01_P000" (solid, remove dead copper, pour order 0): 0.889,70.675 0.889,1.016 158.877,1.016 158.877,70.548
no net on Top Layer "NONET_L01_P001" (solid, pour order 1): 0.889,70.612
GND on Bottom Layer "GND_L02_P002" (solid, remove dead copper, pour order 2): 0.889,70.739 0.889,1.016 158.877,1.016 158.877,70.612

## Other copper
Top Layer:
  text "output_register" at 140.335,3.075 h1.22

## Silkscreen, mask and mechanical layers (free items; w line width, h text height)
Top Overlay:
  text "7" at 145.542,58.801 h1.52
  text "6" at 145.542,56.134 h1.52
  text "5" at 145.542,53.594 h1.52
  text "4" at 145.542,51.054 h1.52
  text "3" at 145.542,48.514 h1.52
  text "CLR'" at 7.112,48.26 h1.52
  text "2" at 145.542,45.974 h1.52
  text "CLK" at 7.239,45.593 h1.52
  text "1" at 145.542,43.434 h1.52
  text "OI" at 7.239,42.926 h1.52
  text "0" at 145.542,41.021 h1.52